# Altium PCB 音频带3W功放.pcbdoc
Units mm, origin at the board's own origin, x right, y up, seen from the top; angles counter-clockwise.
Board outline 144.9 x 109.39 mm, 2 copper layers (Top Layer, Bottom Layer); 71 components, 108 nets, 256 pads, 96 vias.
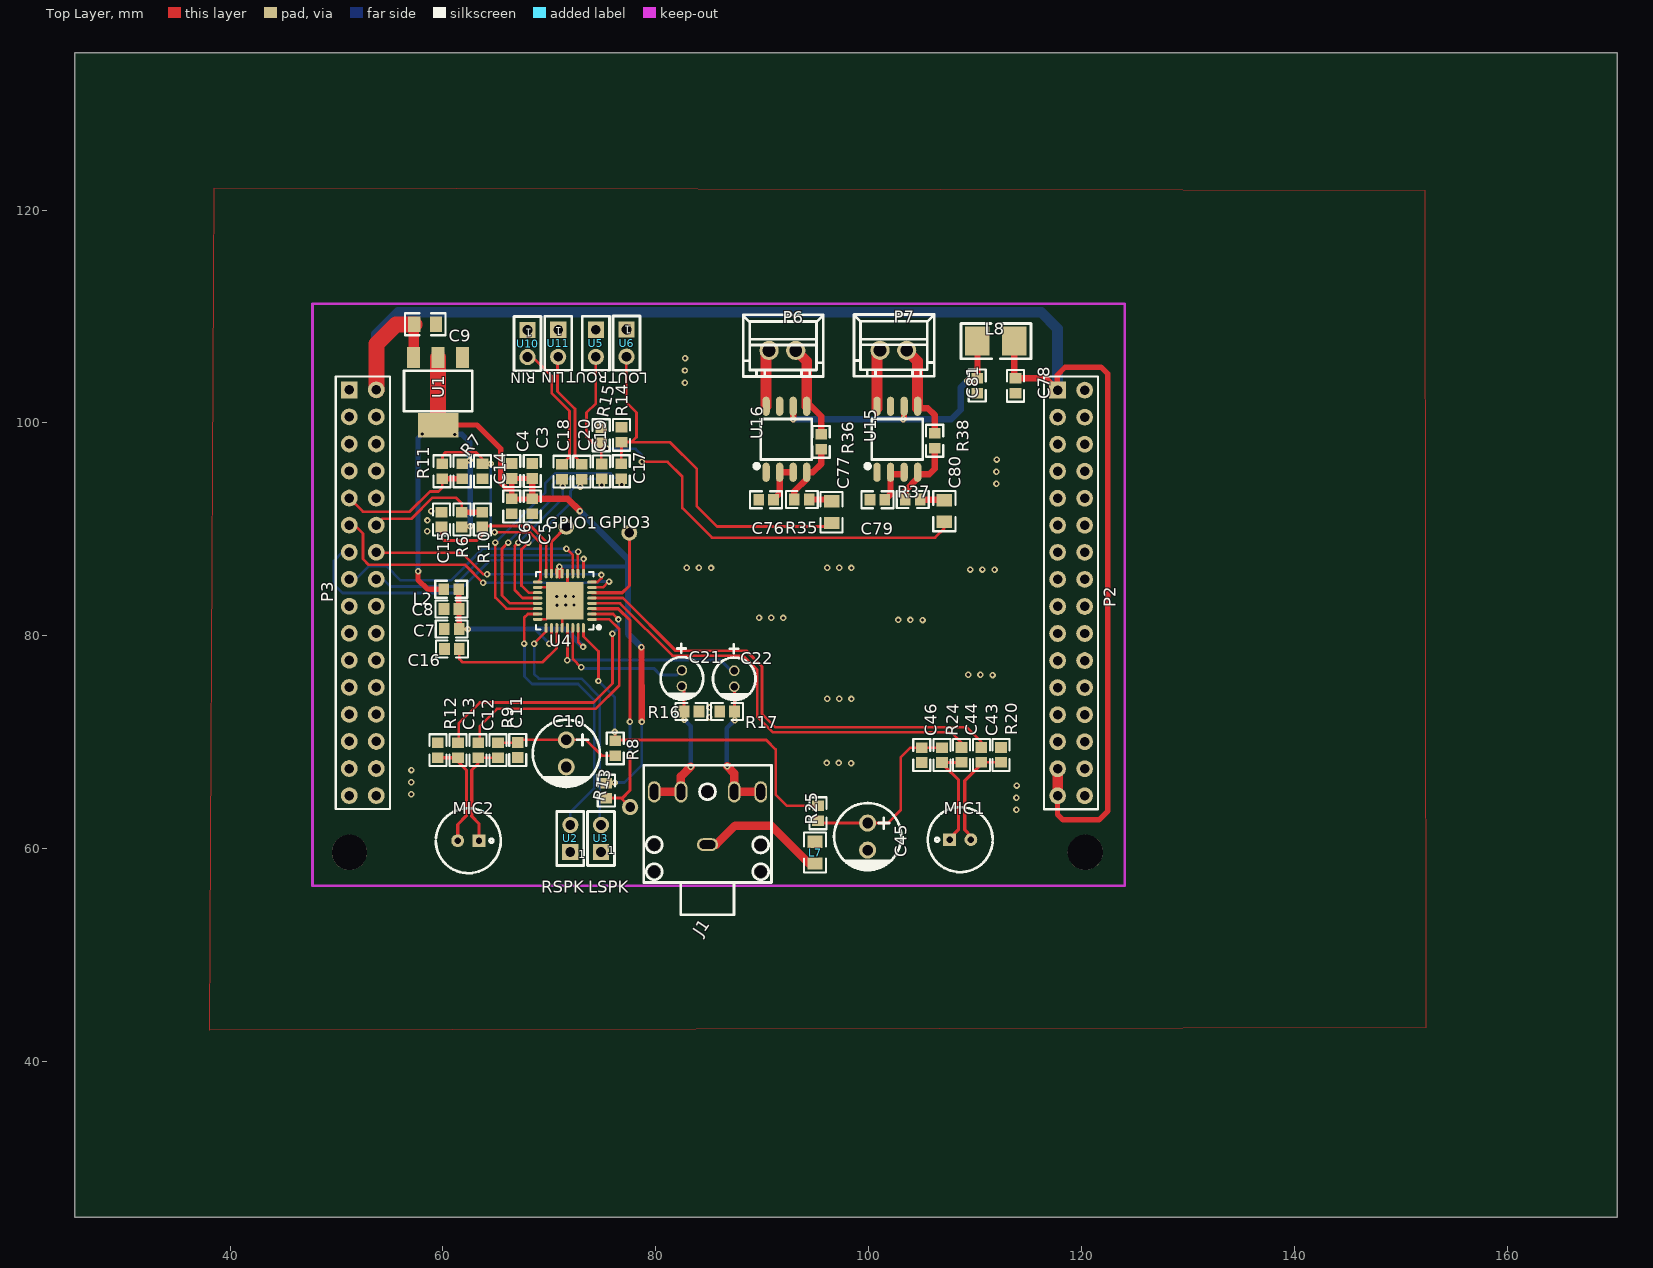
[diagram p0: Top Layer view]
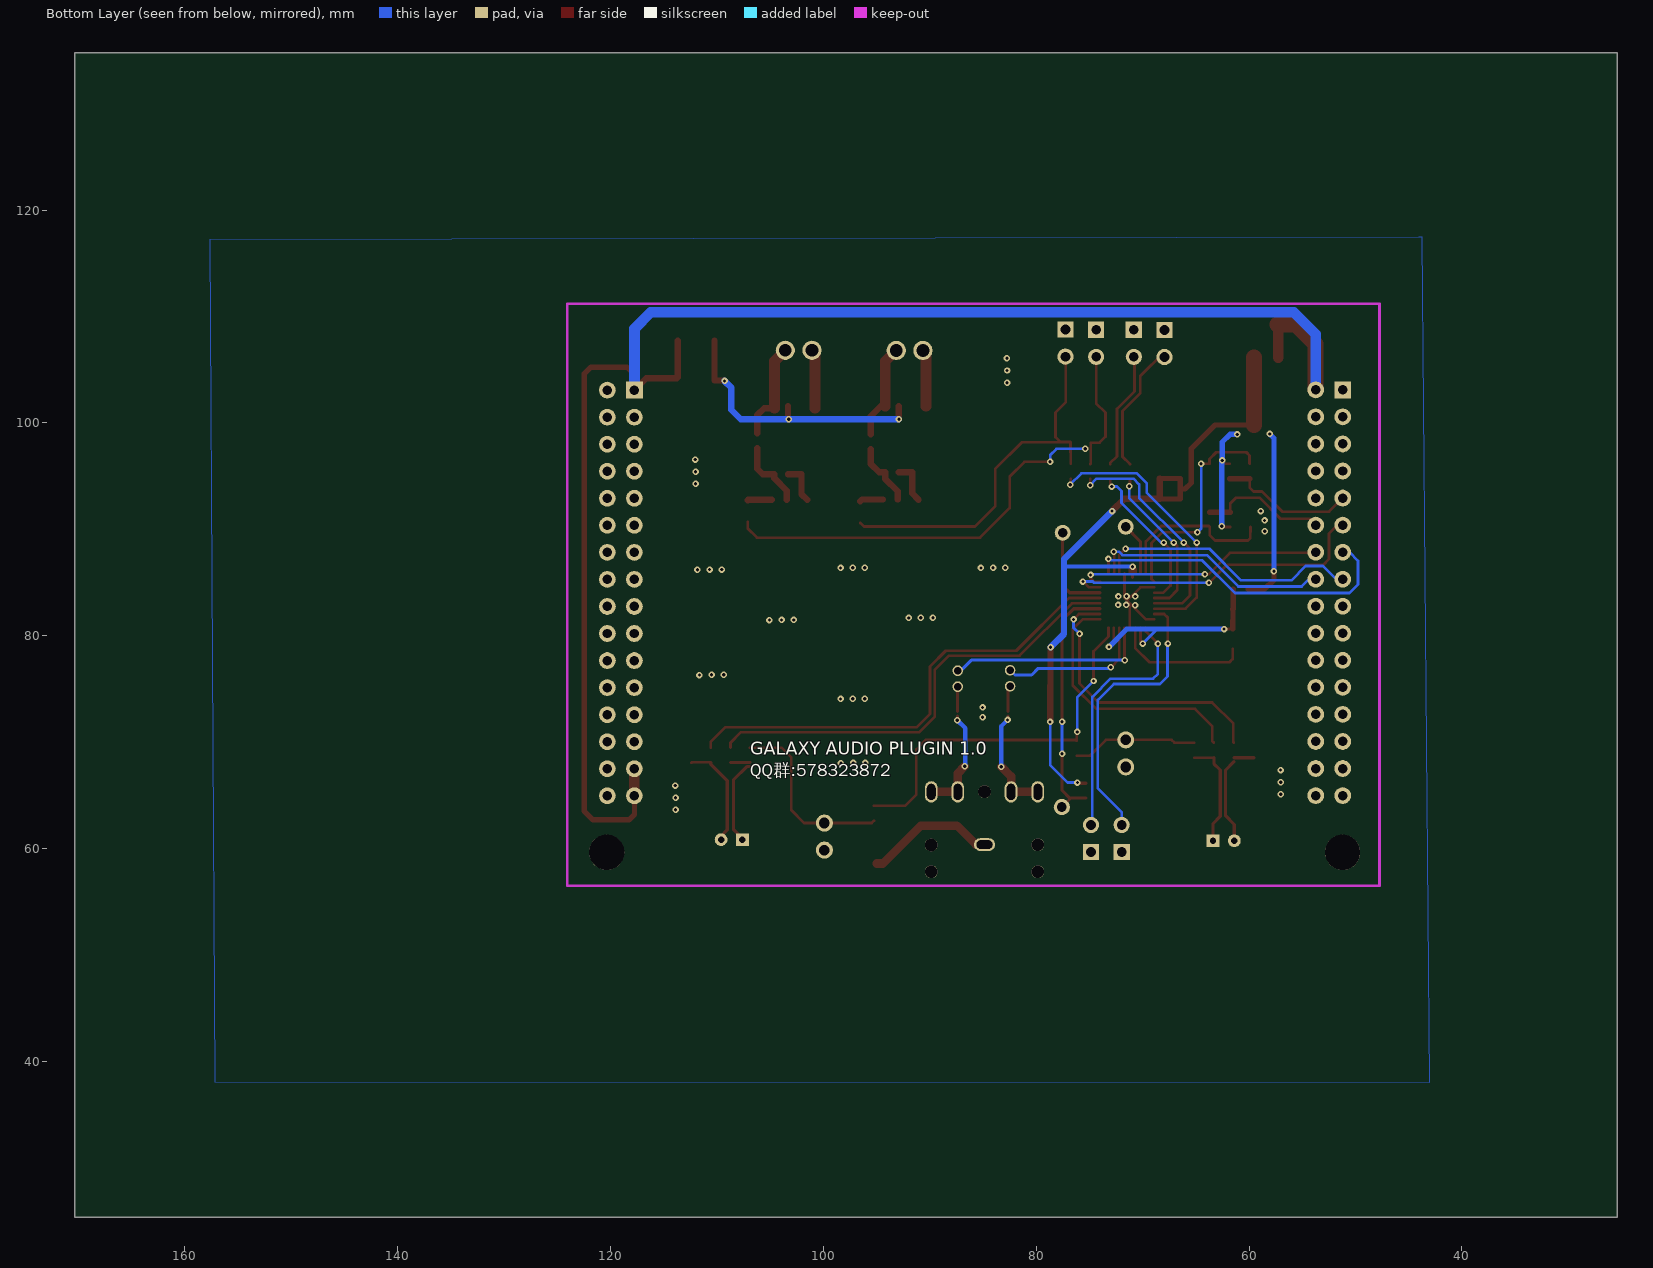
[diagram p1: Bottom Layer view, seen from below]

## Layer stack, top to bottom
Top Layer: signal copper (thickness not stored)
Dielectric: dielectric 0.32, FR-4, Dk 4.8
Bottom Layer: signal copper (thickness not stored)

## Board outline
170.3,25.4 25.4,25.4 25.4,134.787 170.3,134.787

## Components (designator, comment, footprint, x,y, rotation, side; value= is the part's Value field where it differs from the comment)
C3 "10uF" 0603 68.381,95.487 r270 top
C4 "100nF" 0603 66.461,95.487 r90 top
C5 "10uF" 0603 68.38,92.167 r90 top
C6 "100nF" 0603 66.46,92.167 r270 top
C7 "10uF" 0603 60.82,80.647 r0 top
C8 "100nF" 0603 60.8,82.527 r180 top
C9 "10uF" 0805 58.324,109.267 r180 top
C10 "47uF" CAP-TH_BD6.3-P2.50-D1.0-L-FD 71.58,68.967 r270 top
C11 "100nF" 0603 67.02,69.287 r270 top
C12 "1uF" 0603 63.3,69.267 r270 top
C13 "1uF" 0603 61.42,69.266 r270 top
C14 "33pF" 0603 63.72,95.467 r90 top
C15 "33pF" 0603 59.86,90.927 r270 top
C16 "4.7uF" 0603 60.84,78.767 r0 top
C17 "1uF" 0603 76.74,95.467 r90 top
C18 "1uF" 0603 71.18,95.427 r90 top
C19 "1uF" 0603 74.9,95.447 r90 top
C20 "1uF" 0603 73.04,95.427 r90 top
C21 "22uF" CAP-D4.0XF1.5 82.44,76.027 r0 top
C22 "22uF" CAP-D4.0XF1.5 87.36,75.987 r0 top
C43 "1uF" 0603 110.56,68.827 r270 top
C44 "1uF" 0603 108.7,68.827 r270 top
C45 "47uF" CAP-TH_BD6.3-P2.50-D1.0-L-FD 99.88,61.157 r270 top
C46 "100nF" 0603 104.96,68.807 r270 top
C76 "1uF" 0603 90.34,92.787 r180 top
C77 "390nF" 0805 96.5,91.627 r90 top
C78 "100nF" 0603 113.76,103.487 r90 top
C79 "1uF" 0603 100.8,92.787 r180 top
C80 "390nF" 0805 107.082,91.725 r90 top
C81 "100nF" 0603 110.18,103.507 r90 top
GPIO1 "焊盘" 焊盘 71.58,90.247 r0 top
GPIO3 "焊盘" 焊盘 77.5,89.687 r0 top
J1 "PJ-307C" AUDIO-PJ307C 84.84,61.607 r180 top
L2 "0Ω" 0603 60.78,84.387 r0 top
L7 "100Ω" 0805 94.94,59.643 r270 top
L8 "10uH" 1210 111.922,107.705 r180 top
MIC1 "GMI6050P-42DB" MIC-R6.0-2P-2.0PITCH 108.58,60.867 r0 top
MIC2 "GMI6050P-42DB" MIC-R6.0-2P-2.0PITCH 62.38,60.767 r180 top
P2 "Header-Female-2.54_2x16" HDR-16X2/2.54 120.26,82.767 r270 top
P3 "Header-Female-2.54_2x16" HDR-16X2/2.54 53.74,82.787 r270 top
P6 "XH-2A" XH-2A 91.88,106.807 r0 top
P7 "XH-2A" XH-2A 102.3,106.827 r0 top
R6 "4.7K" 0603 61.776,90.927 r270 top
R7 "4.7K" 0603 61.804,95.467 r90 top
R8 "680" 0603 76.18,69.447 r270 top
R9 "2.2K" 0603 65.16,69.266 r270 top
R10 "33" 0603 63.692,90.927 r270 top
R11 "33" 0603 59.92,95.467 r90 top
R12 "2.2K" 0603 59.52,69.267 r90 top
R13 "100K" 0603 75.34,65.467 r90 top
R14 "10K" 0603 76.76,98.886 r270 top
R15 "10K" 0603 74.86,98.847 r270 top
R16 "10K" 0603 83.34,72.907 r180 top
R17 "10K" 0603 86.68,72.907 r0 top
R20 "2.2K" 0603 112.4,68.827 r90 top
R24 "2.2K" 0603 106.86,68.807 r270 top
R25 "680" 0603 95.22,63.347 r270 top
R35 "20K" 0603 93.7,92.807 r180 top
R36 "20K" 0603 95.52,98.227 r270 top
R37 "20K" 0603 104.122,92.805 r180 top
R38 "20K" 0603 106.18,98.327 r270 top
U1 "AMS1117-3.3" SOT-223 59.54,102.967 r270 top
U2 "RSPK" 2PIN 71.96,59.707 r180 top
U3 "LSPK" 2PIN 74.84,59.707 r180 top
U4 "NAU88C22YG" QFN-32_5X5X05P 71.44,83.307 r180 top
U5 "AUX-1" 2PIN 74.36,108.747 r0 top
U6 "AUX-2" 2PIN 77.24,108.767 r0 top
U10 "AUX-2" 2PIN 67.94,108.727 r0 top
U11 "AUX-1" 2PIN 70.82,108.747 r0 top
U15 "FM8002A" SOP-8_150MIL 102.666,98.467 r90 top
U16 "FM8002A" SOP-8_150MIL 92.246,98.467 r90 top

## Footprints (in the part's own frame and the unit in brackets; to place one, negate y for a bottom-side part, rotate by r counter-clockwise, add the part's x,y. Pads: shape width x height; smd on the part's side, far side on the other; paste and mask are expansions set on the pad)
2PIN [mil]
  rect 60x60 hole 36: 1(0,0)
  round 60 hole 36: 2(0,-100)
  silkscreen extent -50,-150 50,50
0603 [mm]
  rect 1x1.1 smd: 1(-0.7,0) 2(0.7,0)
  silkscreen extent -1.5,-0.8 1.5,0.8
0805 [mm]
  rect 1.16x1.45 smd: 1(-1.016,0) 2(1.016,0)
  silkscreen extent -1.9,-1.03 1.87,1.04
1210 [mil]
  rect 90.56x106.3 smd: 1(-68,0) 2(68,0)
  silkscreen extent -130,-65 129,66
AUDIO-PJ307C [mm]
  round 1.2 hole 1.2: 0(-5,3.759) 0(-5,1.245) 0(0,-3.759) 0(5,3.759) 0(5,1.219)
  oval 2x1.2 hole 0.8 slot 1.5 at 0 deg: 1(0,1.205)
  oval 1.2x2 hole 0.8 slot 1.5 at 90 deg: 2(5.004,-3.748) 3(2.489,-3.748) 4(-2.511,-3.748) 5(-5.004,-3.748)
  silkscreen extent -6.01,-6.24 5.99,7.78
CAP-D4.0XF1.5 [mm]
  round 1 hole 0.7: 1(0,0.751) 2(0,-0.751)
  silkscreen extent -2,-2.02 2,3.23
CAP-TH_BD6.3-P2.50-D1.0-L-FD [mm]
  round 1.6 hole 1: 1(-1.27,0) 2(1.27,0)
  silkscreen extent -3.15,-3.15 3.17,3.15
HDR-16X2/2.54 [mil]
  rect 62x62 hole 35: 1(-800,-100)
  round 62 hole 35: 2(-800,0) 3(-700,-100) 4(-700,0) 5(-600,-100) 6(-600,0) 7(-500,-100) 8(-500,0) 9(-400,-100) 10(-400,0) 11(-300,-100) 12(-300,0) 13(-200,-100) 14(-200,0) 15(-100,-100) 16(-100,0) 17(0,-100) 18(0,0) 19(100,-100) 20(100,0) 21(200,-100) 22(200,0) 23(300,-100) 24(300,0) 25(400,-100) 26(400,0) 27(500,-100) 28(500,0) 29(600,-100) 30(600,0) 31(700,-100) 32(700,0)
  silkscreen extent -850,-150 750,50
MIC-R6.0-2P-2.0PITCH [mm]
  rect 1.2x1.2 hole 0.6: 1(-1,0)
  round 1.2 hole 0.6: 2(1,0)
  silkscreen extent -3.05,-3.05 3.05,3.05
QFN-32_5X5X05P [mm]
  oval 0.896x0.28 smd: 1(-2.55,1.75) 2(-2.55,1.25) 3(-2.55,0.749) 4(-2.55,0.249) 5(-2.55,-0.249) 6(-2.55,-0.749) 7(-2.55,-1.25) 8(-2.55,-1.75) 17(2.55,-1.75) 18(2.55,-1.25) 19(2.55,-0.749) 20(2.55,-0.249) 21(2.55,0.249) 22(2.55,0.749) 23(2.55,1.25) 24(2.55,1.75)
  oval 0.28x0.896 smd: 9(-1.75,-2.55) 10(-1.25,-2.55) 11(-0.749,-2.55) 12(-0.249,-2.55) 13(0.249,-2.55) 14(0.749,-2.55) 15(1.25,-2.55) 16(1.75,-2.55) 25(1.75,2.55) 26(1.25,2.55) 27(0.749,2.55) 28(0.249,2.55) 29(-0.249,2.55) 30(-0.749,2.55) 31(-1.25,2.55) 32(-1.75,2.55)
  rect 3.5x3.5 smd: 33(0,0)
  silkscreen extent -3.35,-2.7 2.7,2.7
SOP-8_150MIL [mm]
  oval 1.8x0.7 smd: 1(-3.099,1.905) 2(-3.099,0.635) 3(-3.099,-0.635) 4(-3.099,-1.905) 5(3.099,-1.905) 6(3.099,-0.635) 7(3.099,0.635) 8(3.099,1.905)
  silkscreen extent -2.71,-2.4 1.91,2.99
SOT-223 [mm]
  rect 2x1.2 smd: 1(-3.175,2.3) 2(-3.175,0) 3(-3.175,-2.3)
  rect 2.3x3.8 smd: 4(3.175,0)
  silkscreen extent -1.93,-3.2 1.87,3.2
XH-2A [mm]
  round 1.8 hole 1.199: 1(-1.251,0) 2(1.251,0)
  silkscreen extent -3.69,-2.45 3.83,3.35
焊盘 [mm]
  round 1.5 hole 0.9: 1(0,0)

## Free pads (board coordinates)
  round 1.524 hole 0.914: 1(77.58,63.927)
  round 3.302 hole 3.302 unplated: ""(51.211,59.676) ""(120.32,59.676)

## Via types
v1: diameter 0.61, hole 0.305, Top Layer to Bottom Layer, 96 vias

## Nets (pads, with @x,y where several pads share a name; then routed paths per layer and width w, separated by ;. In a path a pad name is that pad's centre, name@x,y a point inside that pad or via, vN(x,y) a via of type N, cw(c..) or ccw(c..) an arc to the next point about the centre after c; other vN are vias at no path point)
3.3V: P2.3 P3.4
+5V: C9.2 C78.2 L8.1 P2.1 P2.29 P2.31 P3.2 U1.3 | length 153.6
  Top Layer w0.5: P2.31 117.72,63.247 118.24,62.727 121.6,62.727 122.44,63.567 122.44,104.607 121.8,105.247 118.44,105.247 117.7,104.507 117.7,103.107 P2.1
  Top Layer w0.6: L8.1 113.649,104.297 C78.2 116.62,104.187 P2.1
  Top Layer w1: U1.3 57.24,109.199 C9.2 ; P2.31 P2.29
  Top Layer w1.5: P3.2 53.739,107.407 55.601,109.266 C9.2
  Bottom Layer w1: P3.2 53.739,108.327 55.799,110.387 83.28,110.387 116.18,110.387 117.719,108.847 P2.1
AUXOUT1: C19.1 U4.21 | length 21.7
  Top Layer w0.25: v1@66.12,88.767 65.54,88.187 65.54,83.807 66.28,83.067 U4.21 ; C19.1@74.901,94.745 v1(74.921,94.146)
  Bottom Layer w0.254: v1@66.12,88.766 70.321,92.967 70.321,94.227 70.859,94.766 74.319,94.766 v1(74.921,94.146)
  other v1: 66.12,88.767
AUXOUT2: C17.1 U4.22 | length 25.7
  Top Layer w0.25: v1@64.92,88.767 64.92,83.607 65.968,82.558 U4.22 ; C17.1 76.74,94.267 v1(76.8,94.207)
  Bottom Layer w0.25: v1(64.92,88.767) 69.62,93.486 69.62,94.347 70.539,95.266 75.739,95.266 v1(76.8,94.207)
AVCC5V: C81.2 L8.2 U15.6 U16.6 | length 26.2
  Top Layer w0.6: v1(92.881,100.348) U16.6 ; v1(103.22,100.347) 103.301,100.428 U15.6 ; v1(109.26,103.947) 109.3,103.987 110.18,103.987 110.195,104.002 L8.2
  Bottom Layer w0.6: v1(92.881,100.348) 103.218,100.348 v1(103.22,100.347) ; v1(103.22,100.347) 107.74,100.347 108.64,101.247 108.64,103.327 v1(109.26,103.947)
C11_1: C10.1 C11.1 R8.2 R9.1 | length 11.7
  Top Layer w0.25: R9.1@65.16,69.968 C11.1@67.019,69.985 ; C11.1 67.27,70.237 C10.1@71.3,70.237 ; C10.1@71.299,70.237 73.45,70.237 74.939,68.746 R8.2@76.181,68.746
C13_2: C13.2 MIC2.2 R12.1 | length 10
  Top Layer w0.3: R12.1 C13.2 ; MIC2.2 61.38,62.287 62.201,63.107 62.201,67.41 C13.2@61.421,68.19
C21_2: C21.2 J1.2 J1.3 R16.2 | length 12.7
  Top Layer w0.3: C21.2 82.64,75.076 R16.2@82.64,72.907 ; R16.2@82.64,72.454 82.64,72.146 v1(82.68,72.107)
  Top Layer w0.8: J1.2 J1.3 82.351,66.798 v1(83.26,67.707)
  Bottom Layer w0.4: v1(82.68,72.107) 83.26,71.527 v1@83.26,67.707
C22_2: C22.2 J1.4 J1.5 R17.2 | length 12.5
  Top Layer w0.3: C22.2 87.38,75.216 R17.2 ; R17.2@87.379,72.454 v1@87.399,72.086
  Top Layer w0.8: v1@86.7,67.765 87.351,67.095 J1.4 ; J1.4 J1.5
  Bottom Layer w0.4: v1(86.7,67.767) 86.64,67.827 86.64,71.327 v1(87.4,72.087)
C44_2: C44.2 MIC1.1 R24.2 | length 9.9
  Top Layer w0.3: R24.2@106.859,67.727 107.159,67.727 108.421,66.468 108.421,61.847 107.58,61.007 MIC1.1 ; R24.2 106.88,68.127 C44.2
C76_1: C76.1 U16.2 U16.3 | length 4.1
  Top Layer w0.6: C76.1 91.64,93.387 91.64,95.339 U16.2 U16.3
C77_2: C77.2 R35.1 | length 2.2
  Top Layer w0.6: R35.1 96.336,92.807 C77.2
GND: C3.1 C4.2 C5.1 C6.2 C7.1 C8.2 C9.1 C10.2 C11.2 C14.1 C15.1 C16.1 C45.2 C46.2 C76.2 C78.1 C79.2 C81.1 L7.1 P2.2 P2.4 P2.32 P3.1 P3.31 R12.2 R14.1 R15.1 R16.1 R17.1 R20.2 U1.1 U2.1 U3.1 U4.12 U4.18 U4.24 U4.28 U4.33 U5.1 U6.1 U10.1 U11.1 U15.1 U15.7 U16.1 U16.7 | length 11.6
  Top Layer w0.25: U4.24 69.69,81.557 U4.33 ; U4.18 70.19,84.556 U4.33 ; U4.28 71.191,83.058 U4.33 ; U4.12 71.689,83.556 U4.33
  other v1: 113.86,63.667 113.86,64.807 57.02,65.127 113.88,65.947 57.02,66.267 57.04,67.406 98.32,68.047 96.04,68.067 97.18,68.067 85.02,72.367 85.02,73.287 98.36,74.087 96.08,74.107 97.22,74.107 111.62,76.327 109.34,76.347 110.48,76.347 105.04,81.487 102.76,81.507 103.9,81.507 91.96,81.687 89.68,81.707 90.82,81.707 70.7,82.887 71.52,82.907 72.3,82.907 70.68,83.706 71.5,83.727 72.26,83.706 111.8,86.207 109.52,86.227 110.66,86.227 85.18,86.387 98.36,86.387 82.9,86.407 84.04,86.407 96.08,86.407 97.22,86.407 58.52,89.827 58.54,90.847 58.9,91.726 111.98,94.287 111.98,95.427 112,96.566 82.72,103.787 82.72,104.927 82.74,106.067
GPIO1: GPIO1.1 U4.15 | length 5
  Top Layer w0.3: U4.15 70.19,88.857 GPIO1.1
GPIO2: pad.1 U4.3 | length 24.2
  Top Layer w0.254: 76.293,64.767 76.74,64.767 pad.1
  Top Layer w0.3: U4.3 76.469,82.557 77.56,81.467 v1(77.56,71.946) ; 75.34,64.767 76.84,64.767 77.56,65.487 v1(77.56,68.927)
  Bottom Layer w0.3: v1(77.56,68.927) 77.56,68.939 v1(77.56,68.927) v1(77.56,71.946)
GPIO3: GPIO3.1 U4.6 | length 8.7
  Top Layer w0.3: U4.6 76.849,84.057 77.52,84.728 GPIO3.1@77.52,89.607
I2S_BCLK: P3.14 U4.8 | length 23.4
  Top Layer w0.254: P3.14 53.801,87.806 61.779,87.806 63.801,85.787 v1(64.14,85.786) ; U4.8@73.951,85.058 74.512,85.058 74.88,85.426 v1@74.88,85.726
  Bottom Layer w0.254: v1(64.14,85.786) 74.82,85.787 v1(74.88,85.726)
I2S_DI: P3.13 U4.9 | length 30.5
  Top Layer w0.25: U4.9 73.2,85.867 v1(73.2,87.227)
  Bottom Layer w0.254: P3.13 50.58,87.867 49.76,87.047 49.76,84.827 50.56,84.027 61.319,84.027 64.4,87.108 73.08,87.108 v1@73.199,87.227
I2S_DO: P3.16 U4.10 | length 22.7
  Top Layer w0.25: U4.10 72.66,85.887 72.66,87.867 v1(72.7,87.907)
  Bottom Layer w0.254: P3.16 54.38,85.327 55.061,84.646 60.999,84.646 63.941,87.588 71.881,87.588 72.201,87.908 v1(72.7,87.907)
I2S_I2C_SCL: C15.2 R10.2 U4.16 | length 15.6
  Top Layer w0.254: C15.2@59.859,90.227 59.879,89.188 60.1,88.967 63.181,88.967 63.692,89.477 63.692,90.227 63.791,90.326 68.241,90.326 69.691,88.875 U4.16
I2S_I2C_SDA: C14.2 R11.2 U4.17 | length 21.3
  Top Layer w0.25: v1(64.84,89.726) 68.16,89.727 69.16,88.727 69.16,85.327 U4.17
  Top Layer w0.254: R11.2 59.96,96.207 59.96,96.947 60.26,97.247 63.08,97.247 63.72,96.607 C14.2 v1(64.5,96.167)
  Bottom Layer w0.254: v1(64.5,96.167) 64.5,90.066 v1(64.84,89.726)
I2S_LRCK: P3.11 U4.7 | length 29.9
  Top Layer w0.254: P3.11 51.7,90.407 52.48,89.627 52.48,87.227 53.021,86.686 62.061,86.686 v1(63.76,84.987) ; U4.7 75.01,84.557 75.559,85.107 v1@75.6,85.107
  Bottom Layer w0.254: v1(63.76,84.987) 74.54,84.987 74.66,85.107 v1@75.6,85.107
  other v1: 75.6,85.106
I2S_MCLK: P3.15 U4.11 | length 25.3
  Top Layer w0.25: v1(71.6,88.186) 72.189,87.597 U4.11
  Bottom Layer w0.254: P3.15 51.82,85.327 53.059,86.567 54.68,86.567 56.021,85.225 60.758,85.225 63.719,88.187 v1(71.6,88.186)
L7_2: J1.1 L7.2 | length 12.3
  Top Layer w0.8: J1.1 85.654,60.402 87.44,62.188 90.82,62.188 94.379,58.626 L7.2
L_IN: C17.2 C77.1 R14.2 U6.2 | length 37.3
  Top Layer w0.25: C17.2@76.74,96.168 76.76,98.187 76.821,98.246 77.761,98.246 78.18,98.667 78.18,100.986 77.199,101.967 U6.2@77.199,106.706
  Top Layer w0.254: R14.2 81.341,98.187 83.82,95.708 83.82,92.187 85.74,90.267 96.157,90.267 C77.1@96.5,90.61
LAUXI: C20.2 U11.2 | length 11.5
  Top Layer w0.25: U11.2@70.76,106.727 70.76,102.967 72.399,101.327 72.399,96.866 73.041,96.226 C20.2
LAUXIN: C20.1 U4.19 | length 14.7
  Top Layer w0.25: v1@68.02,88.767 67.38,88.127 67.38,84.727 68.05,84.057 U4.19 ; v1(72.9,94.026) 73.04,94.167 C20.1
  Bottom Layer w0.25: v1@68.02,88.767 68.26,88.767 71.98,92.487 71.98,93.607 72.4,94.027 v1@73.04,94.027
  other v1: 68.02,88.767
LHP: C21.1 U4.30 | length 14
  Top Layer w0.25: U4.30 72.191,77.836 v1(72.98,77.047)
  Bottom Layer w0.3: v1(72.98,77.047) 73.081,76.947 79.799,76.947 80.419,76.328 81.981,76.328 C21.1@82.431,76.777
LSPKOUT: U3.2 U4.25 | length 23.9
  Top Layer w0.25: v1(68.56,79.267) 69.69,80.397 U4.25
  Bottom Layer w0.25: v1(68.56,79.267) 68.561,76.427 69,75.988 73.001,75.988 74.72,74.268 74.72,62.365 U3.2@74.84,62.246
MICBIAS: R8.1 R25.1 U4.32 | length 36
  Top Layer w0.25: U4.32 73.191,79.955 74.6,78.546 v1(74.6,75.767) ; v1@76.14,70.987 76.18,70.947 R8.1 ; R8.1 76.258,70.227 90.361,70.227 91.239,69.348 91.239,65.106 92.301,64.047 R25.1
  Bottom Layer w0.25: v1(74.6,75.767) 76.14,74.226 v1@76.14,70.987
  other v1: 76.14,70.987
MICN: C13.1 U4.2 | length 26.8
  Top Layer w0.25: C13.1 61.48,70.026 61.48,71.767 63.46,73.747 74.14,73.747 75.92,75.527 v1(75.92,80.207) ; U4.2 75.98,82.066 v1(76.48,81.547)
  Bottom Layer w0.25: v1(75.92,80.207) 76.48,80.767 v1(76.48,81.547)
MICP: C12.1 U4.1 | length 24.5
  Top Layer w0.25: C12.1 63.46,70.127 63.46,71.527 65.08,73.147 74.34,73.147 76.56,75.367 76.56,80.627 75.63,81.557 U4.1
OTH3.3V: C3.2 C4.1 C5.2 C6.1 L2.1 R6.2 R7.2 R13.2 U1.2 U1.4 U4.13 U4.14 | length 98
  Top Layer w0.25: U4.14 U4.13 ; 70.94,85.487 70.94,85.859 v1(70.94,86.507)
  Top Layer w0.254: R6.2 62.48,90.227 v1(62.56,90.307) ; R7.2 62.2,96.166 v1(62.52,96.486)
  Top Layer w0.3: U4.14 70.691,86.257 v1(70.94,86.507) 71.191,86.255 U4.13 ; R13.2 v1@76.06,66.167 ; v1@76.06,66.167 76.12,66.227 v1@76.06,66.167
  Top Layer w0.5: v1@57.659,86.066 57.659,85.266 58.54,84.387 L2.1@60.08,84.387 ; U1.4@59.539,99.792 63.199,99.808 65.419,97.588 65.419,94.387 66.008,93.801 66.46,93.801 ; C5.2 C6.1 66.46,94.786 C3.2
  Top Layer w0.6: C3.2@68.38,94.786 68.38,92.866 71.7,92.886 v1@72.861,91.725 ; v1@78.639,78.947 v1@78.68,71.946
  Top Layer w1.5: U1.4 U1.2
  Bottom Layer w0.25: v1@76.12,66.227 77.04,66.227 78.68,67.867 v1@78.68,71.927
  Bottom Layer w0.4: v1(70.94,86.507) 70.961,86.528 77.3,86.547
  Bottom Layer w0.5: v1@57.66,86.067 57.66,98.567 v1(58.06,98.967) ; v1@61.1,98.927 61.78,98.927 62.52,98.187 v1(62.52,96.486) 62.56,96.447 v1(62.56,90.307)
  Bottom Layer w0.6: v1(72.86,91.726) 77.38,87.207 77.38,80.187 v1(78.64,78.926)
  other v1: 76.12,66.227 78.68,71.926 57.66,86.067 61.1,98.926
PA0: P3.9 R7.1 R11.1 | length 12.9
  Top Layer w0.254: P3.9 52.48,91.667 56.879,91.667 58.779,93.567 59.579,93.567 59.92,93.907 R11.1@59.92,94.766
  Top Layer w0.5: R11.1 R7.1
PA1: P3.12 R6.1 R10.1 | length 12
  Top Layer w0.254: P3.12 54.339,91.007 57.039,91.007 59.021,92.988 61.2,92.988 61.776,92.411 R6.1
  Top Layer w0.5: R6.1@61.776,91.627 R10.1@63.692,91.627
PA7: P3.18
PA8: P3.17
PA9: P3.20
PA10: P3.19
PA11: P3.22
PA12: P3.21
PB0: P3.32
PB1: P2.26
PB2: P2.24
PB3: P2.23
PB5: P2.25
PB7: P2.28
PB8: P2.27
PB13: P2.10
PC0: P2.30
PD8: P2.21
PD9: P2.22
PD10: P2.19
PD11: P2.20
PD12: P2.17
PD13: P2.18
PD14: P2.15
PD15: P2.16
PE10: P3.8
PE12: P3.10
PF7: P2.8
PF8: P2.7
PF9: P2.6
PF10: P2.5
PG0: P3.29
PG1: P3.30
PG3: P3.27
PG5: P3.28
PG6: P3.25
PG7: P3.26
PG8: P3.23
PG9: P3.24
PG11: P2.13
PG12: P2.14
PG13: P2.11
PG14: P2.12
PG15: P2.9
R9_2: C12.2 MIC2.1 R9.2 | length 10.2
  Top Layer w0.25: C12.2 R9.2
  Top Layer w0.3: C12.2@63.3,68.566 63.3,68.007 62.701,67.407 62.701,63.046 63.379,62.368 MIC2.1@63.379,60.768
R13_1: R13.1
R20_1: C43.2 MIC1.2 R20.1 | length 10
  Top Layer w0.25: C43.2 112.34,68.127 R20.1@112.381,68.086
  Top Layer w0.3: MIC1.2@109.579,60.867 109.579,61.207 109,61.786 109,66.407 110.56,67.966 C43.2@110.56,68.126
R24_1: C45.1 C46.1 R24.1 R25.2 | length 17.6
  Top Layer w0.25: R25.2 95.44,62.427 C45.1 ; C45.1@99.879,62.426 101.779,62.426 102.98,63.628 102.98,68.566 103.92,69.505 C46.1@104.959,69.505 ; C46.1 R24.1
R36_1: P6.2 R36.1 U16.5 | length 9.1
  Top Layer w0.6: U16.5 94.581,101.566 95.52,100.627 R36.1
  Top Layer w1: P6.2 94.151,105.786 U16.5
R36_2: R35.2 R36.2 U16.4 | length 6.1
  Top Layer w0.6: R35.2 93,93.587 94.151,94.738 U16.4 94.741,95.368 95.52,96.147 R36.2
R37_1: C80.2 R37.1 | length 2.3
  Top Layer w0.6: R37.1@104.822,92.805 107.018,92.805 C80.2
R_IN: C19.2 C80.1 R15.2 U5.2 | length 50.4
  Top Layer w0.25: U5.2@74.36,106.727 74.36,101.847 73.481,100.966 73.481,98.708 74.04,98.146 R15.2 74.86,96.187 C19.2
  Top Layer w0.254: v1@78.679,96.345 81.079,96.345 82.479,94.946 82.479,92.007 85.26,89.226 106.2,89.226 107.081,90.11 C80.1
  Top Layer w0.3: R15.2@75.237,97.71 v1(75.38,97.567)
  Bottom Layer w0.254: v1(75.38,97.567) 78.08,97.567 78.679,96.968 v1@78.679,96.345
  other v1: 78.68,96.347
RAUXI: C18.2 U10.2 | length 12.5
  Top Layer w0.25: U10.2@67.941,106.727 67.941,106.666 70.219,104.387 70.219,102.787 71.881,101.126 71.881,96.826 C18.2@71.18,96.127
RAUXIN: C18.1 U4.20 | length 14.8
  Top Layer w0.25: v1@67.08,88.767 66.74,88.427 66.74,84.307 67.49,83.557 U4.20 ; C18.1 71.18,94.127 v1(71.26,94.047)
  Bottom Layer w0.25: v1@67.08,88.767 71.26,92.947 v1(71.26,94.047)
  other v1: 67.08,88.767
RHP: C22.1 U4.29 | length 18.9
  Top Layer w0.25: v1(71.66,77.727) 71.69,77.757 U4.29
  Bottom Layer w0.3: v1(71.66,77.727) 86.071,77.727 C22.1@87.06,76.737
RMICN: C43.1 U4.5 | length 45.3
  Top Layer w0.25: U4.5 76.911,83.557 81.862,78.606 88.481,78.606 89.959,77.128 89.959,72.668 91.201,71.426 109.179,71.426 110.559,70.046 C43.1@110.559,69.526
RMICP: C44.1 U4.4 | length 43.2
  Top Layer w0.25: U4.4 76.629,83.059 81.539,78.146 88.181,78.146 89.52,76.808 89.52,72.406 90.96,70.966 107.701,70.966 108.699,69.968 C44.1@108.699,69.526
RSPKOUT: U2.2 U4.23 | length 27.1
  Top Layer w0.25: v1(67.62,79.287) 67.62,81.707 67.97,82.057 U4.23
  Bottom Layer w0.25: v1(67.62,79.287) 67.659,79.246 67.659,76.188 68.36,75.487 72.701,75.487 74.2,73.986 74.2,65.688 71.959,63.448 U2.2@71.959,62.246
S$21: 
S$23: 
S$67: 
S$69: 
S$2331: 
SP_VD33: C7.2 C8.1 L2.2 U4.26 U4.31 | length 22.3
  Top Layer w0.25: C7.2 v1(62.34,80.646) ; v1(69.98,79.287) 70.19,79.497 U4.26 ; U4.31 72.69,79.437 v1(73.16,78.967)
  Top Layer w0.5: L2.2 61.48,82.547 C8.1@61.52,82.507 ; C8.1@61.5,82.525 C7.2@61.52,80.646
  Bottom Layer w0.25: 67.931,80.647 68.62,80.647 v1(69.98,79.287)
  Bottom Layer w0.5: v1(62.34,80.646) 71.48,80.647 v1(73.16,78.967)
U4_27: C16.2 U4.27 | length 12.7
  Top Layer w0.25: C16.2 61.54,77.826 61.84,77.527 69.361,77.527 70.692,78.858 U4.27
U15_2: C79.1 U15.2 U15.3 | length 3.9
  Top Layer w0.6: C79.1 102.031,93.318 102.031,95.188 U15.3@103.301,95.188
U15_4: R37.2 R38.2 U15.4 | length 6.6
  Top Layer w0.6: R37.2@103.422,92.805 103.422,93.649 104.571,94.798 104.571,95.188 105.681,95.188 106.18,95.687 R38.2
U15_5: P7.2 R38.1 U15.5 | length 9.5
  Top Layer w0.6: U15.5@104.571,101.386 105.541,101.386 106.18,100.747 R38.1
  Top Layer w1: P7.2 104.571,105.806 U15.5@104.571,101.386
U15_8: P7.1 U15.8 | length 5.6
  Top Layer w1: U15.8@100.761,101.386 100.761,106.539 P7.1
U16_8: P6.1 U16.8 | length 5.4
  Top Layer w1: U16.8 90.341,106.519 P6.1
undefined: 
USB0_DM: P3.6
USB0_DP: P3.3
USB1_DM: P3.7
USB1_DP: P3.5
pads on no net: J1.0

## Polygon pours and split planes (outlines as drawn)
GND on Bottom Layer (solid): 44.05,117.437 157.6,117.187 157.15,38.137 43.039,38.1 43.75,117.437
GND on Top Layer (solid): 38.5,122.087 152.188,121.85 152.3,43.187 38.1,42.987 38.5,122.087

## Silkscreen, mask and mechanical layers (free items; w line width, h text height)
Top Overlay:
  text "LIN" at 71.423,104.779 h1 r180
  text "ROUT" at 75.456,104.778 h1 r180
  text "RIN" at 68.712,104.736 h1 r180
  text "LOUT" at 79.244,104.719 h1 r180
Bottom Overlay:
  text "GALAXY AUDIO PLUGIN 1.0 / QQ群:578323872" at 106.82,66.406 h2.03
Document:
  lines w0.003: 97.824,80.068 97.875,80.119

## Text inside footprints (layer, text, board x,y; h text height)
U2: Top Overlay "1" at 72.693,59.113 h0.76
U3: Top Overlay "1" at 75.473,59.513 h0.76
U5: Top Overlay "。" at 74.587,99.999 h0.76 r248
U6: Top Overlay "1" at 77.7,109.111 h0.76 r180
U10: Top Overlay "1" at 68.4,108.831 h0.76 r180
U11: Top Overlay "1" at 71.22,108.971 h0.76 r180